# Altium PCB FD-JUL-BB_PCB.PcbDoc
Units mil, origin at the board's own origin, x right, y up, seen from the top; angles counter-clockwise.
Board outline 1060 x 480 mil, 2 copper layers (Top Layer, Bottom Layer), stack 60.4 mil thick; 9 components, 2 nets, 13 pads, 0 vias.
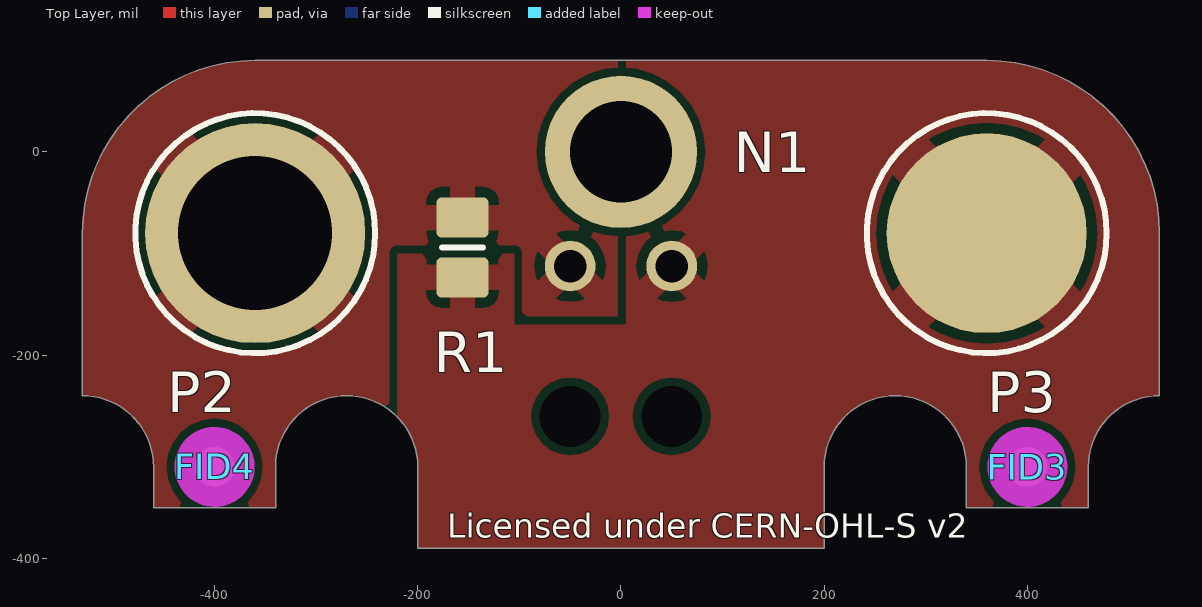
[diagram p0: Top Layer view]
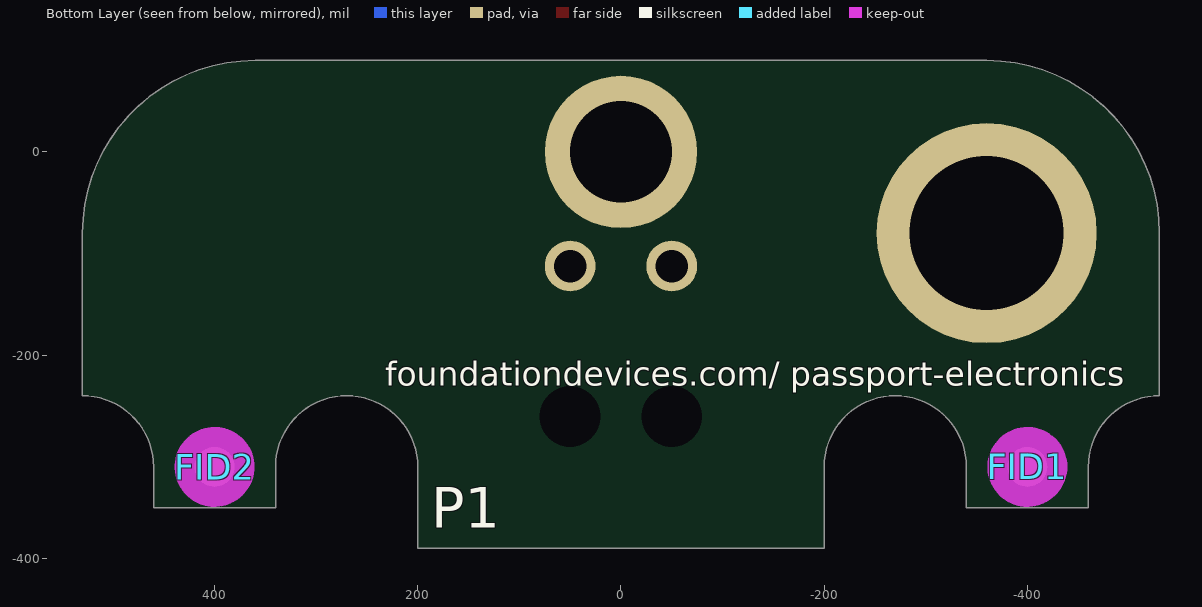
[diagram p1: Bottom Layer view, seen from below]

## Layer stack, top to bottom
Top Solder: solder mask 0.5, Solder Resist, Dk 3.3
Top Layer: signal copper 0.7
Dielectric1: core 59, FR-4, Dk 4.3
Bottom Layer: signal copper 0.7
Bottom Solder: solder mask 0.5, Solder Resist, Dk 3.3

## Board outline
-460,-350 -340,-350 -340,-310 cw(c-270,-310) -270,-240 cw(c-270,-310) -200,-310 -200,-390 200,-390 200,-310 cw(c270,-310) 270,-240 cw(c270,-310) 340,-310 340,-350 460,-350 460,-310 cw(c530,-310) 530,-240 530,-80 ccw(c360,-80) 360,90 -360,90 ccw(c-360,-80) -530,-80 -530,-240 cw(c-530,-310) -460,-310

## Design rules (kind name [scope] priority, off if disabled: settings)
Clearance Fiducials [InComponent('FID1') or InComponent('FID2') or InComponent('FID3') or InComponent('FID4')] p1: gap=7.87 ignorepadtopadclearanceinfootprint=FALSE except(0: Arc-SMDPad)
Clearance [All] p2: gap=7.87 ignorepadtopadclearanceinfootprint=FALSE
ComponentClearance "Ref Step" [Identifier = 'FD-1842_Battery-PCBA_v03_REFERENCE_2020-06-19'] p1: gap=-39.37 collisioncheckmode=3 verticalgap=-39.37 showdistances=FALSE
ComponentClearance [All] p2: gap=10 collisioncheckmode=3 verticalgap=10 showdistances=FALSE
DiffPairsRouting [All] p1: maxlimit=10 minlimit=10 mostfreqgap=10 toplayer_minwidth=10 toplayer_maxwidth=10 toplayer_prefwidth=10 bottomlayer_minwidth=10 bottomlayer_maxwidth=10 bottomlayer_prefwidth=10 maxuncoupledlength=500
HoleSize [All] p1: absolutevalues=TRUE maxlimit=300 minlimit=10 maxpercent=80.000 minpercent=20.000
MinimumAnnularRing [All] p1: minimumring=8
MinimumSolderMaskSliver [All] p1: minsoldermaskwidth=5
PlaneClearance [All] p1: clearance=15
PlaneConnect [All] p1: pad.planeconnectstyle=Relief pad.reliefexpansion=20 pad.reliefentries=4 pad.reliefconductorwidth=10 pad.reliefairgap=10 via.planeconnectstyle=Direct via.reliefexpansion=20 via.reliefentries=4 via.reliefconductorwidth=10 via.reliefairgap=10
PolygonConnect "P2 Thermal Relief" [HasFootprint('MIMX - 0871-0-15-20-82-14-11-0_V')] p1: thpad.connectstyle=Relief thpad.reliefconductorwidth=50 thpad.reliefentries=4 thpad.polygonreliefangle="45 Angle" thpad.airgapwidth=10 smdpad.connectstyle=Relief smdpad.reliefconductorwidth=50 smdpad.reliefentries=4 smdpad.polygonreliefangle="45 Angle" smdpad.airgapwidth=10 via.connectstyle=Direct via.reliefconductorwidth=10 via.reliefentries=4 via.polygonreliefangle="90 Angle" via.airgapwidth=10
PolygonConnect "P3 Thermal Relief" [HasFootprint('MIMX - 0393')] p2: thpad.connectstyle=Relief thpad.reliefconductorwidth=50 thpad.reliefentries=4 thpad.polygonreliefangle="45 Angle" thpad.airgapwidth=10 smdpad.connectstyle=Relief smdpad.reliefconductorwidth=50 smdpad.reliefentries=4 smdpad.polygonreliefangle="45 Angle" smdpad.airgapwidth=10 via.connectstyle=Direct via.reliefconductorwidth=10 via.reliefentries=4 via.polygonreliefangle="90 Angle" via.airgapwidth=10
PolygonConnect [All] p3: thpad.connectstyle=Relief thpad.reliefconductorwidth=25 thpad.reliefentries=4 thpad.polygonreliefangle="45 Angle" thpad.airgapwidth=10 smdpad.connectstyle=Relief smdpad.reliefconductorwidth=25 smdpad.reliefentries=4 smdpad.polygonreliefangle="90 Angle" smdpad.airgapwidth=10 via.connectstyle=Direct via.reliefconductorwidth=10 via.reliefentries=4 via.polygonreliefangle="90 Angle" via.airgapwidth=10
RoutingVias [All] p1: holewidth=10 width=20 viastyle="Through Hole" minholewidth=10 minwidth=20 maxholewidth=10 maxwidth=20
SMDNeckDown [All] p1: percent=100.000
SilkToSolderMaskClearance SilkscreenOverComponentPads [IsPad] p1: minsilkscreentomaskgap=5 clearancetoexposedcopper=TRUE
SolderMaskExpansion [All] p1: expansion=1.97 istentingtop=FALSE
Width [All] p1: maxlimit=78.74 minlimit=7.87 preferedwidth=10
23 further rules are at their usual default settings.

## Components (designator, comment, footprint, x,y, rotation, side; value= is the part's Value field where it differs from the comment)
FID1 "FID1X2R" FID1X2R -400,-310 r90 bottom
FID2 "FID1X2R" FID1X2R 400,-310 r90 bottom
FID3 "FID1X2R" FID1X2R 400,-310 r90 top
FID4 "FID1X2R" FID1X2R -400,-310 r90 top
N1 "SMTSO-080-4ET" "PNENG - SMTSO-080-4ET" 0,0 r0 top
P1 "829-22-002-20-002101" "MIMX - 829-22-002-20-002101_V" 0,-337.32 r180 bottom
P2 "0393-0-00-15-00-00-09-0*" "MIMX - 0393" -360,-80 r0 top
P3 "0871-0-57-20-82-14-11-0" "MIMX - 0871-0-15-20-82-14-11-0_V" 360,-80 r0 top
R1 "RES 0 OHM JUMPER 1/8W 0805" RESC0805(2012)_L -156,-94 r90 top

## Footprints (in the part's own frame and the unit in brackets; to place one, negate y for a bottom-side part, rotate by r counter-clockwise, add the part's x,y. Pads: shape width x height; smd on the part's side, far side on the other; paste and mask are expansions set on the pad)
FID1X2R [mm] "Fiducial - Round 1x2mm"
  round 1 smd paste-0.5 mask+0.5: 0(0,0)
  Top Layer keep-out circle w1: c0,0 r0.5
"MIMX - 0393" [mm] "Peg"
  round 5.5 hole 3.85: 1(0,0)
  silkscreen extent -3,-3 3,3, body extent -2.37,-2.37 2.38,2.38, height 9.12
"MIMX - 829-22-002-20-002101_V" [mil] "2 Position Spring Piston Connector Through Hole, Right Angle"
  round 50 hole 32: 1(-50,225) 2(50,225)
  round 0 hole 60 unplated: H1(-50,77) H2(50,77)
  body extent -100,-179 100,239, height 100
"MIMX - 0871-0-15-20-82-14-11-0_V" [mm] "Pad Circle, 5mm"
  round 5 smd: 1(0,0)
  silkscreen extent -3,-3 3,3, body extent -2.37,-2.37 2.37,2.37, height 10.17
"PNENG - SMTSO-080-4ET" [mil] "Surface Mount Nut"
  round 150 hole 100 unplated: 1(0,0)
  body extent -72,-62 72,63, height 125
RESC0805(2012)_L [mm] "Chip Resistor, 2-Leads, Body 2.00x1.20mm, IPC High Density"
  rrect25% 1x1.3 smd: 1(-0.75,0) 2(0.75,0)
  silkscreen extent 0,-0.51 0,0.51, body extent -0.98,-0.63 1.02,0.63, height 0.61

## Part data
FID1 FID2 FID3 FID4: library part CMP-MECH-00000-3, "Fiducial - Round 1x2mm", Pins=0
N1: library part CMP-MECH-00005-3, "Surface Mount Nut", ComponentLink1Description=Website, ComponentLink1URL=https://catalog.pemnet.com/item/reelfast-micropem-surface-mount-nuts-standoffs/surface-mount-nuts-standoffs-br-type-smtso-unified/smtso-080-4et
P1: library part CMP-CON-0049-1, "2 Position Spring Piston Connector Through Hole, Right Angle", Case/Package=SIP
P2: library part CMP-CON-0052-1, "Pin Receptacle Connector 0.065\" ~ 0.082\" (1.65mm ~ 2.08mm) No Tail Solder", Case/Package=SMD/SMT, Max Operating Temperature=125°C, Min Operating Temperature=-55°C, Terminal and Terminal Block Type="PCB TERMINAL", Terminal Gender=Female
P3: library part CMP-CON-0048-2, "Contact Spring Surface Mount", Case/Package=SMD/SMT
R1: library part CMP-RES-00052-1, "0 Ohms Jumper 0.125W, 1/8W Chip Resistor 0805 (2012 Metric)", Case Code (Imperial)=0805, Case Code (Metric)=2012, Max Operating Temperature=155°C, Max Power Dissipation=125mW, Min Operating Temperature=-55°C, Package Quantity=1, Resistance=0, Temperature Coefficient=100ppm/°C, Tolerance=1%, Voltage Rating=150V, Case/Package=0805, Composition="Thick Film", Contact Plating=Tin,Lead, Depth=1.25mm, Features="Automotive AEC-Q200", Height=0.45mm, Lead Free="Lead Free", Length=2mm, Military Standard=Not, Number of Terminations=2, Packaging="Tape and Reel", Power Rating=125mW, Radiation Hardening=No, REACH SVHC=Unknown, Termination=SMD/SMT, Voltage Rating (DC)=150V, Weight=0.000194oz, Width=1.25mm

## Nets (pads, with @x,y where several pads share a name; then routed paths per layer and width w, separated by ;. In a path a pad name is that pad's centre, name@x,y a point inside that pad or via, vN(x,y) a via of type N, cw(c..) or ccw(c..) an arc to the next point about the centre after c; other vN are vias at no path point)
PEG: P1.2 P2.1 R1.2
SPRING: P1.1 P3.1 R1.1
pads on no net: FID1.0 FID2.0 FID3.0 FID4.0 N1.1 P1.H1 P1.H2

## Polygon pours and split planes (outlines as drawn)
PEG on Top Layer "PEG_L01_P001" (solid, remove dead copper, pour order 1): -460,-350 -340,-350 -340,-310 cw(c-270,-310) -270,-240 cw(c-270,-310) -200,-310 -200,-420 200,-420 200,-310 cw(c270,-310) 270,-240 cw(c270,-310) 340,-310 340,-350 460,-350 460,-310 cw(c530,-310) 530,-240 530,-80 ccw(c360,-80) 360,90 -360,90 ccw(c-360,-80) -530,-80 -530,-240 cw(c-530,-310) -460,-310
SPRING on Top Layer "SPRING_L01_P000" (solid, remove dead copper, pour order 0): -220,-100 -105,-100 -105,-170 5,-170 5,90 360,90 cw(c360,-80) 530,-80 530,-240 ccw(c530,-310) 460,-310 460,-350 340,-350 340,-310 ccw(c270,-310) 270,-240 ccw(c270,-310) 200,-310 200,-390 -200,-390 -200,-310 ccw(c-269.98,-309.99) -220,-261.01

## Other copper
Top Layer:
  text "PRIMARY SIDE" at -606.3,381.9 h39.37
Bottom Layer:
  text "SECONDARY SIDE" at -606.3,381.9 h39.37

## Silkscreen, mask and mechanical layers (free items; w line width, h text height)
Top Overlay:
  text "TOP OVERLAY" at -606.3,381.9 h39.37
  text "Licensed under CERN-OHL-S v2" at -170.75,-380 h23.62
Bottom Overlay:
  text "BOTTOM OVERLAY" at -606.3,381.9 h39.37
  text "foundationdevices.com/ passport-electronics" at 231.89,-230 h23.62
Top Paste:
  text "TOP PASTE" at -606.3,381.9 h39.37
Bottom Paste:
  text "BOTTOM PASTE" at -606.3,381.9 h39.37
Top Solder:
  text "TOP SOLDERMASK" at -606.3,381.9 h39.37
Bottom Solder:
  text "BOTTOM SOLDERMASK" at -606.3,381.9 h39.37
Board:
  lines w3.94: -530,-240 cw(c-530,-310) -460,-310 -460,-350 -340,-350 -340,-310 cw(c-270,-310) -270,-240 cw(c-270,-310) -200,-310 -200,-350 -200,-390 -30,-390 200,-390 200,-350 200,-310 cw(c270,-310) 270,-240 cw(c270,-310) 340,-310 340,-350 460,-350 460,-310 cw(c530,-310) 530,-240 530,-80 ccw(c360,-80) 360,90 0,90 -360,90 ccw(c-360,-80) -530,-80 -530,-240
Route Tool Path:
  text "BOARD ROUTE" at -606.3,381.9 h39.37
Dimensions:
  lines w3.94: -530,-240 cw(c-530,-310) -460,-310 -460,-350 -340,-350 -340,-310 cw(c-270,-310) -270,-240 cw(c-270,-310) -200,-310 -200,-350 -200,-390 -30,-390 200,-390 200,-350 200,-310 cw(c270,-310) 270,-240 cw(c270,-310) 340,-310 340,-350 460,-350 460,-310 cw(c530,-310) 530,-240 530,-80 ccw(c360,-80) 360,90 0,90 -360,90 ccw(c-360,-80) -530,-80 -530,-240
  text "DIMENSIONS" at -606.3,381.9 h39.37
Fab Notes:
  drawing of 231 lines, arcs and shapes, not listed
  text "1" at -2571.85,11009.06 h200
  text "2" at 922.24,11009.06 h200
  text "3" at 4229.33,11009.06 h200
  text "4" at 7428.15,11009.06 h200
  text "6" at 14121.06,11009.06 h200
  text "5" at 10745.08,10999.21 h200
  text "REVISIONS" at 11355.31,10797.24 h118.11
  text "DESCRIPTION" at 10626.97,10620.08 h78.74
  text "DATE" at 14032.48,10620.08 h78.74
  text "APPROVED" at 14760.83,10620.08 h78.74
  text "REV" at 8871.06,10608.27 h78.74
  text "NOTES: (UNLESS OTHERWISE SPECIFIED)" at -3569.33,10531.04 h100
  text "M. Beach" at 14705.71,10415.35 h78.74
  text "C1" at 8923.23,10403.54 h78.74
  text "Release for Production" at 9229.33,10403.54 h78.74
  text "07/29/2020" at 13796.26,10403.54 h78.74
  text "1. THIS DRAWING SPECIFIES THE REQUIREMENTS FOR A PRINTED CIRCUIT BOARD" at -3569.33,10255.45 h100
  text "M. Beach" at 14701.77,10214.57 h78.74
  text "Updated panalization drawing and notes." at 9234.25,10213.25 h78.74
  text "11/09/2020" at 13818.42,10210.49 h78.74
  text "C2" at 8923.23,10203.54 h78.74
  text "IN ACCORDANCE WITH SPECIFICATION IPC-6012 CLASS 2 (LATEST REVISION)." at -3451.22,10097.97 h100
  text "2. THE PCB MUST BE LEAD FREE ASSEMBLY PROCESS COMPATIBLE AND MUST BE ABLE TO HANDLE" at -3569.33,9861.75 h100
  text "A MINIMUM OF 5 CYCLES AT 260 DEGREES CELSIUS FOR 10 SECONDS." at -3451.22,9704.27 h100
  text "3. BASE MATERIAL - LAMINATE AND PREPREG SHALL MEET IPC-4101E/124 or /129" at -3569.33,9468.05 h100
  text "A" at -4126.18,9319.68 h250
  text "A" at 15573.82,9319.68 h250
  text "TG - MUST BE GREATER THAN OR EQUAL TO 150 DEGREES CELSIUS." at -3451.22,9310.57 h100
  text "TD - MUST BE GREATER THAN OR EQUAL TO 325 DEGREES CELSIUS." at -3451.22,9153.09 h100
  text "4. COPPER FOIL WEIGHT -  SEE STACKUP DETAIL 'A'" at -3569.33,8916.87 h100
  text "5. MINIMUM CONDUCTIVE WIDTH/SPACING TO BE 0.2mm/0.2mm" at -3569.33,8680.65 h100
  text "6. PLATING FINISH: ENIG" at -3569.33,8444.43 h100
  text "7. SOLDERMASK - TO MEET THE REQUIRMENTS OF IPC-SM-840E (OR LATEST REVISION)." at -3569.33,8208.2 h100
  text "- BLACK COLOR. BOTH SIDES." at -3451.22,8050.72 h100
  text "- SOLDERMASK ON SOLDERABLE SURFACES IS PROHIBITED." at -3451.22,7893.24 h100
  text "- ALL CIRCUITRY DEFINED AS COVERED SHALL NOT BE EXPOSED." at -3451.22,7735.76 h100
  text "8. SILKSCREEN - WHITE EPOXY OR ACRYLIC INK. BOTH SIDES. NO SILKSCREEN ON ANY EXPOSED COPPER FEATURE." at -3569.33,7499.54 h100
  text "9. ELECTRICAL TEST - 100% IPCD356." at -3569.33,7263.32 h100
  text "10. DFM CHECK MUST BE RUN ON BOARD DATA BEFORE BUILDING BOARDS." at -3569.33,7027.1 h100
  text "UNLESS PRIOR APPROVAL IS GIVEN IN WRITING BY FOUNDATION." at -3451.22,6869.62 h100
  text "11. FINISHED PCB THICKNESS IS CRITICAL: FROM L1 PAD TO L2 PAD TO BE 1.6mm +/- 10%" at -3563.7,6628.7 h100
  text "12. TWO SOLDER SAMPLES TO BE PROVIDED" at -3563.7,6392.48 h100
  text "13. SUPPLIER MARKINGS - ON SECONDARY SIDE ONLY." at -3563.7,6156.26 h100
  text "- MUST BE UL RECOGNIZED AND MUST HAVE AN ID THAT CONFORMS TO UL94V-0" at -3445.59,5959.41 h100
  text "14. FINISHED PCB MUST BE PANELIZED FOR ASSEMBLY ACCORDING TO CONTRACT MANUFACTURER'S REQUIREMENTS." at -3535.43,5716.54 h100
  text "B" at -4126.18,5569.68 h250
  text "B" at 15573.82,5569.68 h250
  text "- SEE 'DETAIL B' FOR PREFERED PANEL LAYOUT." at -3437.01,5519.68 h100
  text "- MANUFACTURER CAN PROPOSE PREFERED PANAL DIMENSIONS AND BOARD COUNT. PANEL MUST BE APPROVED BY FOUNDATION DEVICES." at -3437.01,5322.83 h100
  text "- LEAVE AT LEAST 3.2mm GAP BETWEEN PCB'S ON PANEL." at -3437.01,5125.98 h100
  text "- ROUT ENTIRE BOARD OUTLINE EXCEPT WHEN OVERLAPPING THE VERTICAL SCORE LINES" at -3437.01,4929.13 h100
  text "- PANELIZATION MUST BE APPROVED BY CONTRACT MANUFACTURER." at -3437.01,4732.28 h100
  text "Panelization (Detail B)" at -3043.31,2330.71 h86.61
  text "0.4in Rails" at -1543.31,2153.54 h49.21
  text "0.125in(x4) Tooling Holes" at -1137.8,1889.76 h49.21
  text "C" at 15583.66,1829.53 h250
  text "C" at -4126.18,1819.68 h250
  text "0.040in(x3) Fiducials" at -1141.73,1685.04 h49.21
  text "Layer Stack-Up (Detail A)" at 1122.05,985.6 h86.61
  text "Layer" at 1122.05,881.07 h35.43
  text "Gerber" at 2551.25,881.07 h35.43
  text "Copper" at 3075.49,881.07 h35.43
  text "Insulator" at 3657.58,881.07 h35.43
  text "Name" at 1122.05,810.21 h35.43
  text "Document" at 2551.25,810.21 h35.43
  text "Thickness" at 3075.49,810.21 h35.43
  text "Thickness" at 3657.58,810.21 h35.43
  text "Top Solder Mask" at 1122.05,710.46 h49.21
  text "(.GTS)" at 2551.25,710.46 h49.21
  text "0.5oz Plated Copper Foil" at 1279.53,570.87 h49.21
  text "L1" at 1122.05,569.23 h49.21
  text "(.GTL)" at 2551.25,569.23 h49.21
  text "0.03mm" at 3075.49,569.23 h49.21
  text "1.540mm" at 3661.42,472.44 h49.21
  text "L2" at 1122.05,421.15 h49.21
  text "(.GBL)" at 2551.25,421.15 h49.21
  text "0.03mm" at 3075.49,421.15 h49.21
  text "0.5oz Plated Copper Foil" at 1279.53,413.39 h49.21
  text "Bottom Solder Mask" at 1127.31,275.59 h49.21
  text "(.GBS)" at 2544.63,275.59 h49.21
  text "Total Board Thickness:" at 1122.05,118.11 h49.21
  text "1.60mm" at 3075.49,106.19 h49.21
  text "Score Line" at -2854.33,-1377.95 h49.21
  text "Score Line" at -1771.65,-1377.95 h49.21
  text "LICENCE: CERN-OHL-S v2 /  / SPDX-FileCopyrightText: 2020 Foundation Devices, Inc. <hello@foundationdevices.com> / SPDX-License-Identifier: CERN-OHL-S-2.0 /  / You may redistribute and modify this source and make products using it  / under the terms of the CERN-OHL-S v2 (https://ohwr.org/cern_ohl_s_v2.txt). /  / This source is distributed WITHOUT ANY EXPRESS OR IMPLIED WARRANTY,  / INCLUDING OF MERCHANTABILITY, SATISFACTORY QUALITY AND FITNESS FOR A  / PARTICULAR PURPOSE. Please see the CERN-OHL-S v2 for applicable conditions. /  / Source location: foundationdevices.com/passport-electronics /  / As per CERN-OHL-S v2 section 4, should You produce hardware based on this  / source, You must where practicable and applicable maintain the Source Location  / visible (1) on the packaging of the hardware, (2) on the circuit board(s) via  / silkscreen or copper, (3) in any documentation, and (4) on other products you / make using this source." at 7290.39,-1656.93 h100
  text "D" at -4126.18,-1980.32 h250
  text "D" at 15573.82,-1980.32 h250
  text "Foundation Devices Inc." at 13663.39,-2096.46 h78.74
  text "DRAWN BY" at 10000.98,-2147.64 h78.74
  text "6 Liberty Square #6018" at 13663.39,-2243.45 h78.74
  text "FOUNDATION" at 11231.66,-2305.12 h236.22
  text "'.PCB_ENGINEER'" at 10150.59,-2320.87 h78.74
  text "Boston, MA 02109" at 13663.39,-2385.18 h78.74
  text "PCB PART NUMBER:" at 11196.26,-2596.46 h78.74
  text "APPROVED BY" at 9973.43,-2612.2 h78.74
  text "'.PCB_CHECKER'" at 10170.28,-2769.69 h78.74
  text "'.PCB_PART_NUMBER'" at 11201.77,-2785.43 h118.11
  text "SIZE" at 11182.09,-2982.28 h78.74
  text "DATE:" at 11654.53,-2982.28 h78.74
  text "VARIANT:" at 13741.23,-2982.28 h78.74
  text "REV" at 15197.83,-2982.28 h78.74
  text "APPROVED ON" at 9973.43,-3017.72 h78.74
  text "'.ModifiedDate'" at 12343.5,-3120.08 h118.11
  text "'.VariantName'" at 13862.71,-3159.45 h78.74
  text "C" at 11303.9,-3172.42 h118.11
  text "'.PCB_ENGINEER_APP_DATE'" at 10170.28,-3175.2 h78.74
  text "'.PCB_REV'" at 15206.69,-3179.13 h118.11
  text "SCALE: 1/1" at 11196.26,-3396.46 h78.74
  text "DO NOT SCALE DRAWING" at 12096.26,-3396.46 h78.74
  text "SHEET" at 13786.42,-3395.67 h78.74
  text "1" at 14426.18,-3395.67 h78.74
  text "OF" at 14741.14,-3395.67 h78.74
  text "1" at 15203.74,-3395.67 h78.74
  text "1" at -2571.85,-3690.94 h200
  text "2" at 922.24,-3690.94 h200
  text "3" at 4229.33,-3690.94 h200
  text "4" at 7428.15,-3690.94 h200
  text "6" at 14121.06,-3690.94 h200
  text "5" at 10745.08,-3700.79 h200
Bottom Designator:
  lines w3.94: -885.83,342.52 728.35,342.52 ; -885.83,460.63 728.35,460.63 ; -452.76,224.41 -452.76,342.52 ; 255.91,224.41 255.91,342.52 ; -885.83,224.41 -885.83,480.32 -885.83,578.74 -787.4,578.74 728.35,578.74 728.35,224.41 -885.83,224.41
  text "FOUNDATION DEVICES" at -780.62,622.05 h78.74
  text "PCB PART NUMBER:" at -842.52,503.94 h39.37
  text "'.PCB_PART_NUMBER'" at -177.28,499.01 h39.37
  text "LAYER:" at -842.52,385.83 h39.37
  text "REVISION:" at -842.52,267.72 h29.53
  text "'.PCB_REV'" at -566.93,267.72 h29.53
  text "VARIANT:" at -409.45,267.72 h29.53
  text "'.VariantName'" at -173.23,267.72 h29.53
  text "DATE:" at 299.21,267.72 h29.53
  text "'.ModifiedDate'" at 456.69,267.72 h29.53
Top Assembly:
  text "TOP ASSEMBLY" at -606.3,381.9 h39.37
Bottom Assembly:
  text "BOTTOM ASSEMBLY" at -606.3,381.9 h39.37
Top Courtyard:
  text "TOP COURTYARD" at -596.46,381.9 h39.37
Bottom Courtyard:
  text "BOTTOM COURTYARD" at -596.46,381.9 h39.37
Top 3D Body:
  text "TOP 3D BODY" at -606.3,381.9 h39.37
Bottom 3D Body:
  text "BOTTOM 3D BODY" at -606.3,381.9 h39.37

## Dimensions
360,90 to 200,-390 on Dimensions
-270,-310 to -270,-305.69 on Dimensions
-530,-310 to -525.04,-305.04 on Dimensions
0,0 to 530,-80 on Dimensions
0,0 to 360,-80 on Dimensions
0,0 to -360,-80 on Dimensions
-530,-240 to 530,-240 on Dimensions
-340,-350 to -460,-350 on Dimensions
0,0 to -360,90 on Dimensions
0,0 to -200,-390 on Dimensions
270,-240 to 460,-350 on Dimensions
270,-240 to 200,-390 on Dimensions
0,0 to 530,-240 on Dimensions
0,0 to 460,-350 on Dimensions
0,0 to -340,-350 on Dimensions
-200,-390 to 0,0 on Dimensions